# Altium PCB PG4D.PcbDoc (part 2 of 3)
Units mm, origin at the board's own origin, x right, y up, seen from the top; angles counter-clockwise.
Board outline 105.86 x 51.8 mm, 4 copper layers (Top Layer, L2 Flex GND, L3 Flex Signals, Bottom Layer), stack 0.361 mm thick; 218 components, 118 nets, 582 pads, 307 vias.
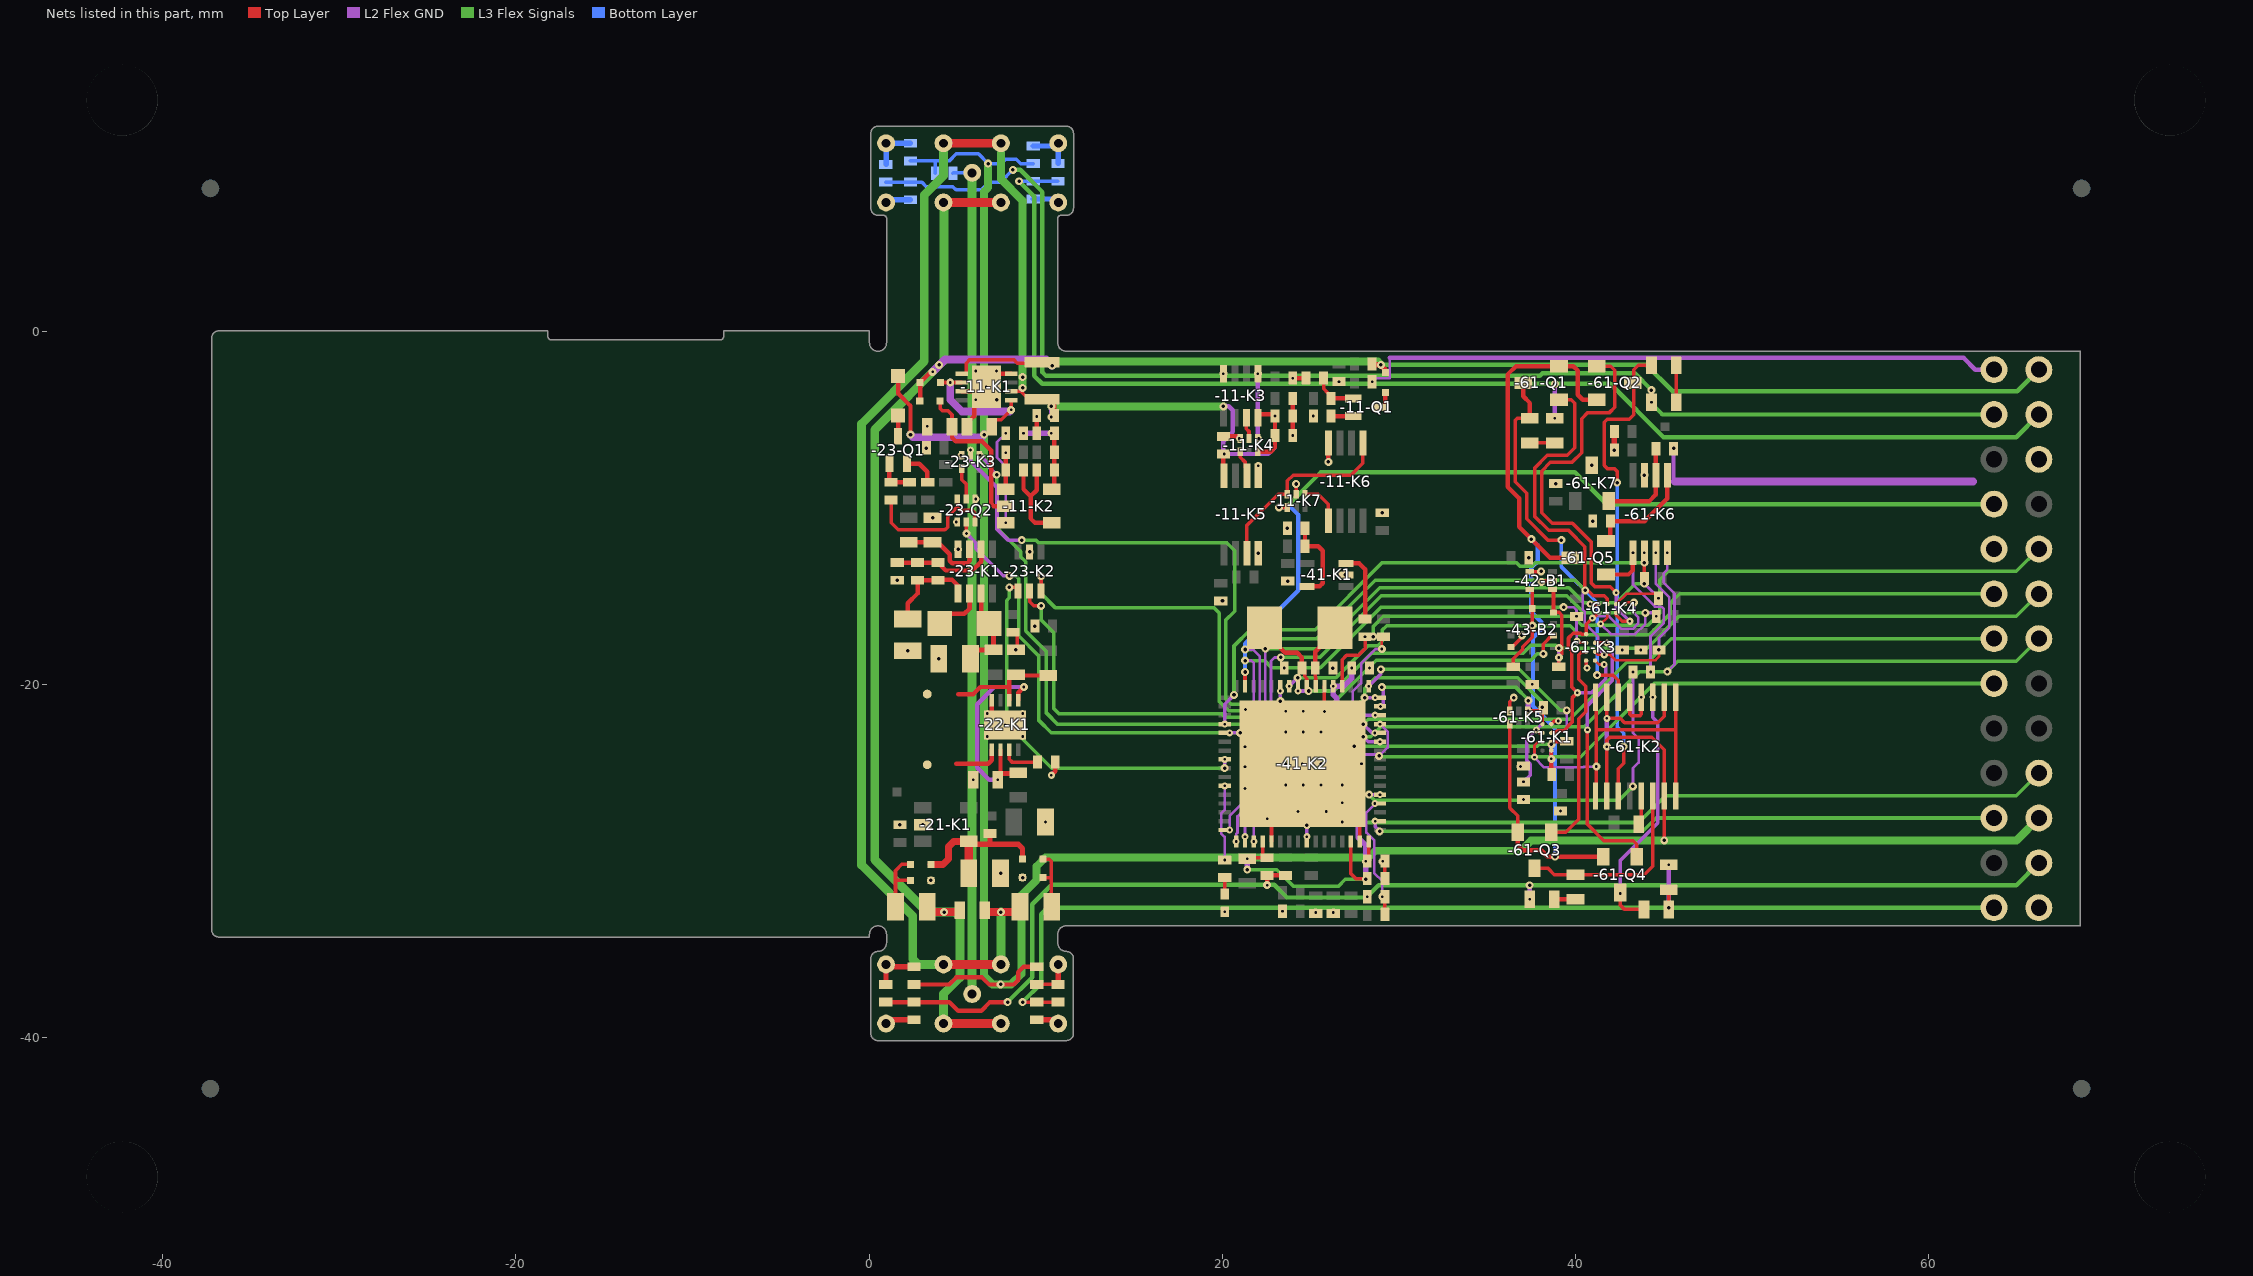
[diagram p4: the nets of this part, all layers, seen from the top]

## Via types
v1: diameter 0.45, hole 0.15, Top Layer to L2 Flex GND, tented both sides, 88 vias
v2: diameter 0.45, hole 0.2, Top Layer to Bottom Layer, tented both sides, 74 vias
v3: diameter 0.4, hole 0.15, Top Layer to L2 Flex GND, tented both sides, 61 vias
v4: diameter 0.45, hole 0.2, L2 Flex GND to L3 Flex Signals, 41 vias
v5: diameter 0.45, hole 0.2, L2 Flex GND to L3 Flex Signals, tented both sides, 23 vias
v6: diameter 0.4, hole 0.15, Top Layer to L2 Flex GND, tented top, 9 vias
v7: diameter 0.45, hole 0.15, Top Layer to L2 Flex GND, 8 vias
v8: diameter 0.45, hole 0.15, Top Layer to L2 Flex GND, tented top, 3 vias

## Nets (pads, with @x,y where several pads share a name; then routed paths per layer and width w, separated by ;. In a path a pad name is that pad's centre, name@x,y a point inside that pad or via, vN(x,y) a via of type N, cw(c..) or ccw(c..) an arc to the next point about the centre after c; other vN are vias at no path point) (continued)
3V3BUS: -11-C6.1 -11-C7.1 -11-C8.1 -11-C9.1 -11-K1.6 -11-K3.8 -11-K4.6 -11-K5.8 -11-R1.1 -11-R2.1 -11-R13.2 -11-R14.1 | length 27.9
  Top Layer w0.2: -11-K1.6@8.05,-3.4 8.6,-3.4 9.05,-3.85 -11-R13.2@9.75,-3.85
  Top Layer w0.25: -11-R13.2@9.8,-3.85 10.3,-3.85 10.5,-4.05 -11-C6.1@10.5,-4.775 ; -11-K5.8@20.075,-8.175 20.075,-7 v1(20.125,-6.95) ; -11-K3.8@22,-4.7 -11-C7.1@23.1,-4.7 ; -11-K4.6@22.025,-6.825 22.75,-6.825 23,-6.575 -11-C8.1@23,-5.9 v1(23,-4.8) ; v1(24,-2.65) -11-R2.1@24.75,-2.65
  L2 Flex GND w0.25: v1(10.325,-4.85) v5(10.325,-4.25) ; v5(20.075,-4.25) 20.375,-4.25 20.6,-4.475 20.6,-5.7 20.075,-6.225 20.075,-6.95 v1(20.125,-6.95) 22.625,-6.95 23,-6.575 v1(23,-4.8)
  L3 Flex Signals w0.45: v5(10.325,-4.25) v5(20.075,-4.25)
  other v1: 25.175,-4.8
ACCINT: -41-K2.27 -43-B2.7 | length 18
  Top Layer w0.2: v2(38.2,-18.275) 38.2,-17.719 38.694,-17.225 -43-B2.7@38.775,-17.225
  L2 Flex GND w0.2: v4(23.3,-20.95) v3(23.3,-20.375)
  L3 Flex Signals w0.2: v4(23.3,-20.95) 23.402,-21.052 26.298,-21.052 28.725,-18.625 37.5,-18.625 37.85,-18.275 v2(38.2,-18.275)
ANEN: -23-K3.4 -23-Q2.2 | length 1.8
  Top Layer w0.2: -23-K3.4@5.25,-7.775 5.25,-8.4 5.5,-8.65 -23-Q2.2@5.5,-9.5
ANFON: -23-Q2.5 -41-K2.37 | length 25.7
  Top Layer w0.2: -23-Q2.5@5.5,-10.8 5.5,-11.425 v1(5.525,-11.45)
  L2 Flex GND w0.2: v1(5.525,-11.45) 6.05,-11.975 6.05,-12.3 7.6,-13.85 v5(7.95,-13.85) v5@7.95,-13.875 ; v3(20.425,-22.75) v4(21.025,-22.75)
  L3 Flex Signals w0.2: v5(7.95,-13.85) 8.3,-13.85 8.475,-14.025 8.475,-17.25 9.625,-18.4 9.625,-22.05 10.325,-22.75 v4(21.025,-22.75)
ANODE: -1-R9.2 -1-R10.2 -1-R11.2 -1-R12.2 -1-R13.2 -2-X25.1 -23-R10.1 -61-K2.2 -61-K2.7 -61-K2.10 -61-K2.15 | length 156.6
  Top Layer w0.2: -61-K2.10@41.8,-26.325 v1(41.8,-23.525) 41.8,-23.175 41.975,-23 44.35,-23 45.05,-23.7 -61-K2.15@45.05,-26.325 v2(45.05,-28.841) ; v3@41.8,-22.05 v3(41.8,-21.925) ; -61-K2.7@41.8,-20.725 v3(41.8,-21.925) ; -61-K2.2@45.05,-20.725 45.05,-21.8 44.675,-22.175 42.8,-22.175 42.55,-21.925 v3(41.8,-21.925)
  Top Layer w0.25: -23-R10.1@1.65,-2.525 1.65,-3.525 2.35,-4.225 v2(2.35,-5.85) ; -1-R11.2@2.55,-37 4.55,-37 4.95,-36.6 6.4,-36.6 6.8,-37 v2(7.45,-37) 8.2,-37 8.45,-36.75 8.45,-36.3 8.75,-36 -1-R12.2@9.5,-36
  L2 Flex GND w0.25: v1(41.8,-23.525) 41.8,-23.1 v3(41.8,-21.925)
  L2 Flex GND w0.45: v2(2.35,-5.85) 2.5,-6 6.375,-6 v4(6.525,-5.85)
  L3 Flex Signals w0.45: v2(6.75,9.5) 6.75,8.15 6.525,7.925 v4(6.525,-5.85) 6.525,-36.525 7,-37 v2(7.45,-37) 8.05,-37 8.65,-36.4 8.65,-31.925 9.5,-31.075 9.5,-30.302 10.002,-29.8 28.301,-29.8 28.676,-29.425 36.925,-29.425 37.509,-28.841 v2(45.05,-28.841) 65,-28.841 -2-X25.1@66.27,-27.571
  Bottom Layer w0.2: -1-R10.2@2.35,9.65 3.75,9.65 ; -1-R13.2@3.75,8.95 3.75,9.65 ; -1-R9.2@9.3,9.5 8.6,9.5 8.35,9.75 7.75,9.75 7.5,9.5 v2(6.75,9.5) 6.2,10.05 4.95,10.05 4.55,9.65 3.75,9.65
BA_ISO: -21-C1.2 -21-R2.2 -21-R4.1 | length 3.9
  Top Layer w0.2: -21-C1.2@1.5,-32.6 1.5,-31.1 ; -21-R4.1@2.35,-31.1 1.5,-31.1 ; -21-R2.2@2.35,-30.2 1.85,-30.2 1.5,-30.55 1.5,-31.1
BB_ISO: -21-C2.2 -21-R3.2 -21-R5.1 | length 3.6
  Top Layer w0.2: -21-R5.1@9.825,-30.95 -21-R5.1@9.85,-30.95 10.325,-30.95 ; -21-R3.2@9.85,-29.9 10.2,-29.9 10.325,-30.025 10.325,-30.95 ; -21-C2.2@10.325,-32.6 10.325,-30.95
BUSA: -1-X21.1 -1-X31.1 -1-X61.1 -1-X71.1 -2-X1.1 -11-R4.1 -11-R5.2 -11-R6.1 -11-R7.1 -21-C1.1 -21-R1.1 | length 127.4
  Top Layer w0.25: 2.9,-3.75 -11-R5.2@2.9,-2.9 3.5,-2.3 v1(3.6,-2.3)
  Top Layer w0.3: -11-R7.1@28.5,-1.9 28.95,-1.9 29.25,-2.2 -11-R4.1@29.25,-2.325
  Top Layer w0.45: -21-C1.1@3.327,-32.9 v2(4.25,-32.9) 5.15,-32.9 -21-R1.1@5.15,-32.8
  Top Layer w0.5: -21-C1.1@3.3,-32.6 3.3,-32.873 -21-C1.1@3.327,-32.9 ; -1-X61.1@4.216,-39.215 -1-X71.1@7.468,-39.215 ; -1-X31.1@4.219,7.302 -1-X21.1@7.47,7.302
  L2 Flex GND w0.45: v1(3.6,-2.3) 4.3,-1.6 10.025,-1.6 v5(10.375,-1.95)
  L3 Flex Signals w0.25: v2@29.019,-1.894 44.019,-1.894 45.524,-3.4 65.041,-3.4 -2-X1.1@66.27,-2.171
  L3 Flex Signals w0.45: v5(10.375,-1.95) 10.627,-1.698 28.823,-1.698 v2@29.019,-1.894
  L3 Flex Signals w0.5: -1-X61.1@4.216,-39.215 4.216,-37.534 5.15,-36.6 5.15,-33.166 4.884,-32.9 v2(4.25,-32.9) 3.3,-32.9 0.325,-29.925 0.325,-5.575 4.25,-1.65 4.25,7.271 -1-X31.1@4.219,7.302
  other v2: 29,-1.9
  other v4: 3.975,-1.9
BUSB: -1-X22.1 -1-X32.1 -1-X62.1 -1-X72.1 -2-X2.1 -11-C1.2 -11-C2.2 -11-C3.2 -11-C4.2 -11-C6.2 -11-C7.2 -11-C8.2 -11-C9.2 -11-K1.3 -11-K1.8 -11-K1.9 -11-K2.1 -11-K3.4 -11-K4.3 -11-K5.5 -11-R8.2 -11-R9.1 -11-R11.1 -11-R15.2 -21-C2.1 -21-R1.2 | length 122.9
  Top Layer w0.25: v7(3.3,-5.375) -11-C2.2@3.3,-5.05 ; -11-K1.3@5.25,-3.4 -11-K1.9@5.9,-3.4 ; -11-C3.2@5.55,-5.4 5.55,-5.2 5.95,-4.8 -11-K1.9@5.95,-4.3 ; -11-K1.9@7.4,-2.4 -11-K1.8@8.05,-2.4 ; -11-K2.1@7.75,-8.95 -11-R9.1@7.75,-7.85 v7(7.75,-6.875) -11-R11.1@7.75,-6.85 ; -11-C4.2@9.5,-5.825 -11-C4.2@9.5,-5.775 v1(9.5,-4.825) ; -11-C9.2@20.075,-5.95 -11-K4.3@20.9,-5.95 ; v1(24,-5.9) -11-C7.2@24,-4.8 -11-R15.2@24,-3.8
  Top Layer w0.45: -21-R1.2@6.55,-32.8 6.65,-32.9 v2(7.468,-32.9) 8.25,-32.9 -21-C2.1@8.55,-32.6
  Top Layer w0.5: -1-X62.1@4.216,-35.862 -1-X72.1@7.468,-35.862 ; -1-X32.1@4.219,10.655 -1-X22.1@7.47,10.655
  L2 Flex GND w0.15: v1(28.5,-2.85) 28.683,-2.667 29.489,-2.667 29.489,-1.507
  L2 Flex GND w0.25: 29.489,-1.507 62.009,-1.507 62.674,-2.171 -2-X2.1@63.73,-2.171
  L3 Flex Signals w0.45: -1-X22.1@7.47,10.655 7.47,8.63 8.7,7.4 v4(8.7,-2.6) v4(8.7,-3.2)
  L3 Flex Signals w0.5: -1-X62.1@4.216,-35.862 2.762,-35.862 2.475,-35.575 2.475,-33.125 -0.425,-30.225 -0.425,-5.25 3.125,-1.7 3.125,7.725 4.219,8.819 -1-X32.1@4.219,10.655 ; -1-X72.1@7.468,-35.862 v2(7.468,-32.9)
  other v1: 22.05,-7.625 6.05,-3.875 6.65,-3.15 26.625,-2.85 20.075,-2.4 6.05,-2.25 7.225,-2.25
  other v2: 7.225,-3.875
  other v3: 20.975,-6.075
CH1: -1-R1.2 -1-R5.2 -2-X21.1 -61-C11.1 | length 74.4
  L2 Flex GND w0.25: v1(38.85,-4.925) v4(38.85,-2.975)
  L3 Flex Signals w0.25: v2(8.5,8.5) 9.35,7.65 9.35,-2.517 9.808,-2.975 v4(38.85,-2.975) 41.989,-2.975 45.009,-5.994 64.986,-5.994 -2-X21.1@66.27,-4.711
  Bottom Layer w0.2: v2(8.5,8.5) -1-R1.2@9.3,8.5 -1-R5.2@10.7,8.5
CH2: -1-R2.2 -1-R6.2 -2-X22.1 -61-C12.1 | length 76.4
  L2 Flex GND w0.25: v1(44.325,-4.025) v5(44.325,-3.327)
  L3 Flex Signals w0.25: v2(8.15,9.15) 8.56,9.15 9.823,7.887 9.823,-2.323 10.025,-2.525 38,-2.525 38.15,-2.375 43.373,-2.375 v5(44.325,-3.327) 44.325,-4.091 44.945,-4.711 -2-X22.1@63.73,-4.711
  Bottom Layer w0.2: -1-R6.2@0.95,8.45 -1-R2.2@2.35,8.45 3,8.45 3.25,8.2 4.75,8.2 4.93,8.02 6.37,8.02 6.8,8.45 7.45,8.45 v2(8.15,9.15)
CH3: -1-R3.2 -1-R7.2 -2-X23.1 -61-C13.1 | length 72.8
  Top Layer w0.25: -1-R7.2@0.95,-38 -1-R3.2@2.55,-38 4.55,-38 5.05,-38.5 6.35,-38.5 6.85,-38 v2(7.85,-38)
  L2 Flex GND w0.25: v1(37.425,-32.175) v5(37.425,-31.381)
  L3 Flex Signals w0.25: v2(7.85,-38) 9.25,-36.6 9.25,-32.45 10.35,-31.35 22.95,-31.35 23.675,-32.075 28.174,-32.075 28.868,-31.381 v5(37.425,-31.381) 65,-31.381 -2-X23.1@66.27,-30.111
CH4: -1-R4.2 -1-R8.2 -2-X24.1 -61-C14.1 | length 64
  Top Layer w0.2: v2(8.7,-38) -1-R4.2@9.5,-38 -1-R8.2@10.7,-38
  L2 Flex GND w0.25: v5(45.3,-32.65) v1(45.3,-30.225)
  L3 Flex Signals w0.25: v2(8.7,-38) 9.75,-36.95 9.75,-33.025 10.124,-32.651 -2-X24.1@63.73,-32.651
CMPX: -11-K5.3 -11-K6.1 -11-K7.3 | length 11.2
  Top Layer w0.2: -11-K5.3@21.4,-12.575 21.4,-11 23.175,-9.225 -11-K7.3@23.7,-9.225 23.7,-8.475 24.025,-8.15 27.3,-8.15 27.975,-7.475 -11-K6.1@27.975,-6.325
CMPXBUS: -11-K4.4 -11-K5.6 | length 1.5
  Top Layer w0.15: -11-K5.6@21.3,-7.7 21.4,-7.8 -11-K5.6@21.4,-8.175
  Top Layer w0.2: -11-K4.4@21.025,-6.825 21.025,-7.125 21.3,-7.4 -11-K5.6@21.3,-7.7
DISCHARGE: -41-K2.17 -61-K1.2 -61-R2.2 | length 15.2
  Top Layer w0.2: -61-K1.2@38.65,-23.25 -61-R2.2@39.35,-23.25
  L2 Flex GND w0.15: v3(39.525,-23.225) v5(39.525,-21.475)
  L2 Flex GND w0.2: v3(28.3,-20.1) 29,-19.4 v4(29,-19.15)
  L3 Flex Signals w0.2: v4(29,-19.15) 36.825,-19.15 39.15,-21.475 v5(39.525,-21.475)
DISCHARGE1: -61-C21.2 -61-K2.6 -61-Q1.3 | length 22.5
  Top Layer w0.2: -61-C21.2@37.425,-4.925 36.725,-4.925 36.6,-5.05 36.6,-8.525 37.25,-9.175 37.25,-10.625 38.45,-11.825 v2(39.225,-11.825) ; v2(41.25,-19.475) 42.15,-19.475 42.45,-19.775 -61-K2.6@42.45,-20.725
  Top Layer w0.25: -61-C21.2@37.06,-4.91 37.44,-4.91 37.44,-4.064 37.06,-3.684 -61-Q1.3@37.06,-2.925
  Bottom Layer w0.2: v2(39.225,-11.825) 39.225,-13.35 41.25,-15.375 v2(41.25,-19.475)
DISCHARGE2: -61-C22.2 -61-K2.11 -61-Q2.3 | length 27.5
  Top Layer w0.2: v2(42.375,-8.575) 42.375,-7.925 42.225,-7.775 41.825,-7.775 41.65,-7.6 41.65,-5.15 41.825,-4.975 43.075,-4.975 43.315,-4.735 43.315,-2.185 43.575,-1.925 -61-C22.2@44.325,-1.925 ; -61-K2.11@42.45,-26.325 42.45,-24.775 42.75,-24.475 v2(42.75,-23.525)
  Bottom Layer w0.2: v2(42.375,-8.575) 42.375,-22.4 42.75,-22.775 v2(42.75,-23.525)
DISCHARGE3: -61-C23.2 -61-K2.14 -61-Q3.3 | length 11
  Top Layer w0.2: -61-Q3.3@37.7,-30.415 38.465,-30.415 38.825,-30.775 -61-C23.2@40.025,-30.775 43.925,-30.775 44.4,-30.3 -61-K2.14@44.4,-26.325
DISCHARGE4: -61-C24.2 -61-K2.3 -61-Q4.3 | length 14.3
  Top Layer w0.2: -61-Q4.3@42.55,-31.79 v1(42.55,-31.85) 42.55,-32.5 42.8,-32.75 -61-C24.2@43.9,-32.75
  L2 Flex GND w0.2: v1(42.55,-31.85) 42.55,-29.975 44.675,-27.85 44.675,-22.15 44.4,-21.875 v3(44.4,-20.725)
GND: -2-X5.1 -2-X9.1 -11-C10.2 -11-C11.2 -11-K5.4 -11-K6.4 -11-K7.2 -21-C3.2 -21-C4.2 -21-K1.2 -21-R4.2 -21-R5.2 -21-R7.2 -22-C1.2 -22-C2.2 -22-K1.8 -22-K1.9 -22-R4.2 -23-C1.2 -23-C2.2 -23-C3.2 -23-C5.2 -23-K1.4 -23-K2.5 -23-K3.3 -23-Q2.1 -23-Q2.4 -23-R4.2 -23-R9.2 -23-R12.2 -41-C1.2 -41-C2.2 -41-C3.2 -41-C4.2 -41-C5.2 -41-C6.2 -41-C7.2 -41-K1.2 -41-K2.22 -41-K2.53 -41-K2.63 -41-K2.65 -41-R10.1 -41-R13.2 -41-R15.2 -41-R17.2 -42-B1.2 -42-B1.4 -42-C1.2 -42-C2.2 -43-B2.4 -43-C1.2 -43-C2.2 -43-R3.2 -61-C1.2 -61-C2.2 -61-C3.2 -61-C4.2 -61-C5.2 -61-C6.2 -61-C8.2 -61-C9.2 -61-K1.4 -61-K2.4 -61-K2.5 -61-K3.4 -61-K4.4 -61-K5.3 -61-K6.7 -61-K7.3 -61-R4.2 -61-R10.2 pad.36mils | length 37.3
  Top Layer w0.15: -23-R4.2@8.15,-17.05 8.3,-17.05 -23-R4.2@8.4,-17.15
  Top Layer w0.2: -22-C2.2@8.4,-18 -23-R4.2@8.4,-17.15 ; -41-K2.53@22.8,-28.9 -41-K2.65@22.8,-27.925 ; -11-K7.2@24.2,-9.225 v2(24.2,-8.65) ; -41-K2.22@25.8,-20.1 25.8,-21.533 v1(25.806,-21.539) ; -41-K2.63@27.8,-28.9 -41-K2.65@27.8,-27.975 ; v1(29.1,-30.025) 29.225,-30.15 -41-C7.2@29.225,-31 ; -61-K5.3@36.3,-21.5 36.3,-20.975 v2(36.525,-20.75) ; -43-B2.4@36.375,-17.875 36.456,-17.875 36.982,-17.349 v2(36.982,-17.221) ; -42-B1.4@37.425,-13.625 38.05,-13.625 v2(38.075,-13.6) ; v1(38.1,-14.2) 38.175,-14.125 -42-B1.2@38.725,-14.125 ; -61-K1.4@38.65,-22.25 38.825,-22.075 v6(39.05,-22.075) ; -61-K3.4@40.625,-18.65 40.625,-19.025 v6(40.675,-19.075) ; v6(40.85,-15.45) -61-K4.4@41.325,-15.45 ; -61-K2.5@43.1,-20.725 43.1,-21.7 43.175,-21.775 43.675,-21.775 43.75,-21.7 v3(43.75,-20.725)
  Top Layer w0.25: -22-K1.9@6.95,-21.55 -22-K1.8@6.95,-20.9 ; v3(10.325,-25.15) 10.55,-24.925 -22-R4.2@10.55,-24.4 ; v8(22.55,-31.375) -41-C6.2@22.55,-30.825 -41-R17.2@23.6,-30.825 ; v2(26.025,-7.4) -11-K6.4@26.025,-6.325
  Top Layer w0.3: v2(42.225,-6.725) -61-C5.2@42.225,-5.675
  L2 Flex GND w0.25: v2(45.575,-6.625) 45.575,-8.441 45.643,-8.509
  L2 Flex GND w0.45: 45.643,-8.509 62.535,-8.509
  other v1: 25.3,-32.925 26.3,-32.925 20.15,-32.875 23.425,-32.85 28.225,-32.025 10,-27.8 26.8,-27.8 22.555,-27.61 24.3,-27.2 25.9,-27.2 39.175,-27.175 26.8,-26.7 37.075,-26.525 21.3,-25.9 23.6,-25.7 24.6,-25.7 25.6,-25.7 26.8,-25.7 5.9,-25.4 21.3,-24.675 36.902,-24.651 23.6,-24.5 24.55,-24.5 25.6,-24.5 27.9,-24.5 21.3,-23.525 23.6,-22.7 24.6,-22.7 25.6,-22.7 23.6,-21.525 24.6,-21.525 21.325,-21.425 37.575,-20 23.525,-19.075 28.35,-19.075 42.675,-18.05 43.725,-18.05
  other v2: 3.5,-31.1 8.7,-30.95 7.45,-30.7 1.75,-27.95 3.05,-27.95 26.275,-19.075 3.95,-18.55 2.2,-18.1 8.325,-18.05 9.4,-16.7 20.025,-15.275 23.725,-14.15 1.6,-14.1 26.975,-13.8 37.375,-12.825 22.05,-12.575 9.1,-12.5 5.05,-12.35 23.7,-11.15 41,-10.75 3.6,-10.55 29.075,-10.275 38.9,-8.625 43.925,-8.15 40.95,-7.585 3.25,-6.629
  other v3: 6.7,-22.95 8.7,-22.95 7.7,-22.3 6.7,-21.65 8.7,-21.65 4.95,-10.8 6.05,-9.5 5.2,-7.025
HEARTBEAT: -41-K2.43 -41-R9.1 | length 4.4
  L2 Flex GND w0.15: v1(20.15,-29.95) 20.15,-28.65 19.95,-28.45 19.95,-27.325 20.15,-27.125 v3(20.15,-25.75)
HIZVT: -41-K2.4 -41-R12.2 -41-R13.1 | length 6.9
  Top Layer w0.2: v1(29.075,-32.025) 29.125,-32.025 29.225,-32.125 -41-R12.2@29.225,-33.025
  L2 Flex GND w0.15: v3(28.651,-26.751) 28.651,-26.774 28.175,-27.25 28.175,-28.4 28.626,-28.851 28.626,-30.701 29.075,-31.15 v1(29.075,-32.025)
MISO: -2-X20.1 -41-K2.13 -41-R18.2 | length 48.2
  Top Layer w0.15: v1(29.05,-18) -41-R18.2@29.05,-17.3
  L2 Flex GND w0.15: v3(28.95,-22.25) 29.377,-22.677 29.377,-23.576 v4(28.901,-24.051) 28.825,-23.975 27.275,-23.975 27.023,-23.723 27.023,-21.577 27.4,-21.2 27.4,-20.396 27.875,-19.921 27.875,-18.825 28.7,-18 v1(29.05,-18)
  L3 Flex Signals w0.2: v4(28.901,-24.051) 28.954,-24.104 40.321,-24.104 44.474,-19.951 -2-X20.1@63.73,-19.951
MOSI: -2-X19.1 -23-K2.3 -41-K2.12 -61-K6.3 | length 70.7
  Top Layer w0.2: -23-K2.3@9.75,-14.7 v2(9.75,-13.875)
  L2 Flex GND w0.15: v3(44.575,-12.55) 44.575,-14.302 45.329,-15.056 45.329,-16.796 44.75,-17.375 v5(44.75,-18.05)
  L2 Flex GND w0.2: v4(28,-22.25) 28.501,-22.751 v3(28.651,-22.751)
  L3 Flex Signals w0.2: v2(9.75,-13.875) 9.75,-14.855 10.566,-15.672 19.558,-15.672 19.846,-15.96 19.846,-20.971 20.375,-21.5 22.375,-21.5 23.125,-22.25 v4(28,-22.25) 28.275,-21.975 39.703,-21.975 42.928,-18.75 44.1,-18.75 45.439,-17.411 -2-X19.1@63.73,-17.411
N3V3BUS: -11-C4.1 -11-C12.2 -11-K2.5 -11-R10.2 -11-R12.2 | length 4.9
  Top Layer w0.25: v7(10.325,-5.775) -11-C4.1@10.5,-5.775 ; -11-K2.5@10.5,-8.95 -11-R10.2@10.5,-7.85 -11-R12.2@10.5,-6.85 -11-C4.1@10.5,-5.85
  L2 Flex GND w0.3: v7(8.75,-5.775) v7(10.325,-5.775)
NDA2CS: -23-K2.1 -41-K2.40 | length 22.4
  Top Layer w0.2: v2(7.95,-14.5) -23-K2.1@8.45,-14.5
  Top Layer w0.25: -23-K2.1@8.45,-14.7 -23-K2.1@8.45,-14.5
  L2 Flex GND w0.2: v4(20.15,-24.75) v3(20.15,-24.25)
  L3 Flex Signals w0.2: v2(7.95,-14.5) 7.95,-15.1 7.8,-15.25 7.8,-22.2 10.35,-24.75 v4(20.15,-24.75)
NDACS: -41-K2.36 -61-K6.2 -61-R9.2 | length 32.1
  Top Layer w0.2: -61-R9.2@43.925,-14.1 -61-R9.2@43.925,-14 v3(43.925,-12.55)
  L2 Flex GND w0.2: v3(20.15,-22.25) 20.15,-21.125 v4(20.675,-20.6) ; v5(43.925,-13.1) v3(43.925,-12.55)
  L3 Flex Signals w0.2: v4(20.675,-20.6) 20.675,-17.825 21.6,-16.9 25.275,-16.9 29.075,-13.1 36.675,-13.1 36.877,-13.302 37.573,-13.302 37.775,-13.1 v5(43.925,-13.1)
Net-1-R1_1: -1-R1.1 -1-X11.1 | length 1.1
  Bottom Layer w0.3: -1-R1.1@9.3,7.5 -1-X11.1@10.35,7.5
Net-1-R2_1: -1-R2.1 -1-X41.1 | length 1.1
  Bottom Layer w0.3: -1-X41.1@1.3,7.45 -1-R2.1@2.35,7.45
Net-1-R3_1: -1-R3.1 -1-X51.1 | length 1.3
  Top Layer w0.3: -1-X51.1@1.3,-39 -1-R3.1@2.55,-39
Net-1-R4_1: -1-R4.1 -1-X81.1 | length 0.9
  Top Layer w0.3: -1-R4.1@9.5,-39 -1-X81.1@10.4,-39
Net-1-R5_1: -1-R5.1 -1-R9.1 -1-X12.1 | length 2.2
  Bottom Layer w0.2: -1-R5.1@10.7,9.5 -1-R5.1@10.721,9.521
  Bottom Layer w0.3: -1-R9.1@9.3,10.5 -1-X12.1@10.35,10.5 ; -1-R5.1@10.721,9.521 -1-X12.1@10.721,10.655
Net-1-R6_1: -1-R6.1 -1-R10.1 -1-X42.1 | length 2.6
  Bottom Layer w0.2: -1-R6.1@0.95,9.45 -1-R6.1@0.967,9.467 ; -1-R10.1@2.345,10.655 -1-R10.1@2.35,10.65
  Bottom Layer w0.3: -1-R6.1@0.967,9.467 -1-X42.1@0.967,10.655 -1-R10.1@2.345,10.655
Net-1-R7_1: -1-R7.1 -1-R11.1 -1-X52.1 | length 2.4
  Top Layer w0.2: -1-R7.1@0.95,-37 -1-R7.1@0.965,-36.985
  Top Layer w0.3: -1-R7.1@0.965,-36.985 -1-X52.1@0.965,-35.862 ; -1-X52.1@1.3,-36 -1-R11.1@2.55,-36
Net-1-R8_1: -1-R8.1 -1-R12.1 -1-X82.1 | length 2.3
  Top Layer w0.2: -1-R12.1@9.5,-37 -1-R8.1@10.7,-37 -1-R8.1@10.719,-36.981
  Top Layer w0.3: -1-R8.1@10.719,-36.981 -1-X82.1@10.719,-35.862
Net-1-R13_1: -1-R13.1 -1-X1.1 -1-X2.1 | length 47.6
  L3 Flex Signals w0.5: -1-X2.1@5.842,-37.539 5.842,8.977 -1-X1.1@5.844,8.979
  Bottom Layer w0.2: -1-R13.1@4.75,8.95 4.779,8.979 -1-X1.1@5.844,8.979
Net-11-C2_1: -11-C2.1 -11-K2.2 -11-R6.2 | length 9
  Top Layer w0.2: -11-R6.2@4.025,-3.95 4.025,-4.375 4.15,-4.5 4.475,-4.5 4.7,-4.725 -11-C2.1@4.7,-5.2
  Top Layer w0.25: -11-C2.1@4.7,-5.2 4.7,-6.021 4.904,-6.225 6.4,-6.225 6.925,-6.75 6.925,-9.775 7.05,-9.9 -11-K2.2@7.75,-9.9
Net-11-C3_1: -11-C3.1 -11-K1.2 -11-K1.5 -11-R5.1 | length 8.2
  Top Layer w0.2: -11-R5.1@4.05,-2.9 v1(4.6,-2.9) -11-K1.2@5.25,-2.9 ; -11-C3.1@6.95,-5.4 6.95,-5 7.5,-5 v1(8.05,-4.45) ; v1@8.05,-4.4 -11-K1.5@8.05,-3.9
  Top Layer w0.25: v1(8.05,-4.45) v1@8.05,-4.4
  L2 Flex GND w0.45: v1(4.6,-2.9) 4.6,-3.875 5.275,-4.55 7.95,-4.55 v1(8.05,-4.45)
Net-11-C12_1: -11-C12.1 -11-K2.3 | length 5.5
  L2 Flex GND w0.15: v7(7.75,-10.85) 7.75,-7.65 7.25,-7.15 7.25,-6.275 v7(7.75,-5.775)
Net-11-K1_1: -11-K1.1 -11-R13.1 | length 5.1
  Top Layer w0.2: -11-K1.1@5.5,-2.425 5.5,-1.8 5.7,-1.6 8.204,-1.6 8.404,-1.8 -11-R13.1@9.8,-1.8
Net-11-K2_4: -11-K2.4 -11-R9.2 -11-R10.1 | length 5.9
  Top Layer w0.25: -11-R9.2@8.75,-7.85 8.75,-8.95 9.15,-9.35 ; -11-R10.1@9.5,-7.85 9.5,-9 9.15,-9.35 ; -11-K2.4@10.35,-10.85 9.4,-10.85 9.15,-10.6 9.15,-9.35
Net-11-K3_1: -11-K3.1 -11-K4.1 | length 3.7
  L2 Flex GND w0.25: v1(22.025,-2.4) 22.025,-6.025 v3(22.075,-6.075)
Net-11-K3_7: -11-K3.7 -11-K4.2 | length 1.2
  Top Layer w0.2: -11-K3.7@21.375,-4.9 21.375,-5.525 21.525,-5.675 -11-K4.2@21.525,-6.075
Net-11-K6_5: -11-K6.5 -11-K7.1 | length 2.5
  Top Layer w0.2: -11-K7.1@24.7,-9.225 25.45,-9.225 26.025,-9.8 -11-K6.5@26.025,-10.725
Net-11-Q1_1: -11-Q1.1 -11-R2.2 -11-R3.1 | length 2.6
  Top Layer w0.15: -11-R3.1@26,-3.5 26.175,-3.675 -11-R3.1@26.175,-3.8
  Top Layer w0.2: -11-R2.2@25.75,-2.65 25.75,-3.25 -11-R3.1@26,-3.5
  Top Layer w0.25: -11-R3.1@26.175,-3.8 -11-Q1.1@27.425,-3.8
Net-11-Q1_2: -11-Q1.2 -11-R1.2 | length 1.3
  Top Layer w0.25: -11-R1.2@26.175,-4.8 -11-Q1.2@27.425,-4.8
Net-11-Q1_3: -11-Q1.3 -11-R4.2 | length 1.1
  Top Layer w0.25: -11-Q1.3@28.975,-4.3 29.25,-4.3 -11-R4.2@29.25,-3.475
Net-21-C3_1: -21-C3.1 -21-K1.4 -21-R2.1 -21-R3.1 -21-R6.1 | length 9
  Top Layer w0.3: -21-K1.4@5.95,-29.05 6.85,-29.05 ; -21-R6.1@6.85,-28.45 6.85,-29.05 ; -21-R3.1@8.7,-29.9 8.7,-29.3 8.45,-29.05 6.85,-29.05
  Top Layer w0.4: -21-R2.1@3.5,-30.2 4.2,-30.2 4.5,-29.9 4.5,-29.2 4.8,-28.9 -21-K1.4@5.65,-28.9
  Top Layer w0.5: -21-C3.1@5.65,-30.7 -21-K1.4@5.65,-28.9
Net-22-C1_1: -22-C1.1 -22-K1.2 -22-K1.5 -22-R1.2 | length 11.5
  Top Layer w0.25: -22-C1.1@7.45,-25.2 7.45,-25.05 -22-K1.2@7.45,-23.7 ; -22-K1.5@8.45,-20.9 8.45,-20.475 v8(8.775,-20.15)
  Top Layer w0.3: -22-C1.1@7.45,-25.05 8.4,-25.05 -22-R1.2@8.45,-25
  L2 Flex GND w0.25: v1(7.3,-25.4) 6.8,-25.4 6.125,-24.725 6.125,-21.125 7.1,-20.15 v8(8.775,-20.15)
Net-22-C2_1: -22-C2.1 -22-K1.6 -22-R2.1 -22-R3.2 | length 6.6
  Top Layer w0.25: 5.05,-20.55 5.9,-20.55 6.3,-20.15 7.95,-20.15 ; -22-K1.6@7.95,-20.9 7.95,-20.15 ; -22-R2.1@10.15,-19.5 8.1,-19.5 7.95,-19.65 7.95,-20.15
Net-22-K1_1: -22-K1.1 -22-R3.1 | length 2.7
  Top Layer w0.25: 4.95,-24.5 6.75,-24.5 6.95,-24.3 -22-K1.1@6.95,-23.7
Net-22-K1_3: -22-K1.3 -22-R4.1 | length 2.2
  Top Layer w0.2: -22-K1.3@7.95,-23.7 7.95,-24.25 8.1,-24.4 -22-R4.1@9.55,-24.4
Net-23-C1_1: -23-C1.1 -23-K1.7 -23-R1.2 -23-R3.1 | length 5.1
  Top Layer w0.25: -23-C1.1@5.75,-18.55 5.75,-18.4 -23-C1.1@6.1,-18.05 ; -23-K1.7@6.35,-14.85 6.35,-16.15 6.75,-16.55 -23-R3.1@6.8,-16.55
  Top Layer w0.3: -23-C1.1@6.1,-18.05 -23-R1.2@7.05,-18.05 7.05,-16.8 -23-R3.1@6.8,-16.55
Net-23-C3_1: -23-C3.1 -23-K1.3 -23-R2.1 | length 4.9
  Top Layer w0.25: -23-R2.1@2.25,-11.95 -23-C3.1@3.6,-11.95 3.9,-11.95 4.573,-12.623 4.573,-13.004 4.717,-13.148 5.552,-13.148 5.7,-13 -23-K1.3@5.7,-12.35
Net-23-C4_1: -23-C4.1 -23-C5.1 -23-K1.5 -23-R8.1 | length 5.1
  Top Layer w0.25: -23-C5.1@2.2,-16.3 2.2,-15.4 2.75,-14.85 -23-R8.1@2.75,-14.1 -23-C4.1@3.9,-14.1 ; -23-C4.1@4.125,-14.075 4.7,-14.075 5.05,-14.425 -23-K1.5@5.05,-14.85
Net-23-C4_2: -23-C4.2 -23-K1.2 -23-R8.2 -23-R9.1 | length 5.8
  Top Layer w0.25: -23-R9.1@1.6,-13.1 -23-R8.2@2.75,-13.1 -23-C4.2@3.9,-13.1 4.35,-13.55 5.85,-13.55 6.35,-13.05 -23-K1.2@6.35,-12.35
Net-23-K1_6: -23-K1.6 -23-R3.2 | length 2.9
  Top Layer w0.25: -23-R3.2@4,-16.45 4.45,-16 5.4,-16 5.7,-15.7 -23-K1.6@5.7,-14.85
Net-23-Q1_1: -23-Q1.1 -23-R6.2 -23-R7.1 | length 2.3
  Top Layer w0.25: -23-R7.1@1.15,-8.55 -23-Q1.1@1.15,-7.5 -23-Q1.1@1.15,-7.325 ; -23-R7.1@1.25,-8.55 -23-R6.2@2.3,-8.55
Net-23-Q1_2: -23-Q1.2 -23-R5.2 | length 1.9
  Top Layer w0.25: -23-Q1.2@2.15,-7.5 2.85,-7.5 3.3,-7.95 -23-R5.2@3.3,-8.55
Net-23-Q1_3: -23-Q1.3 -23-R10.2 | length 1.1
  Top Layer w0.25: -23-Q1.3@1.65,-5.775 -23-R10.2@1.65,-4.775 -23-R10.2@1.65,-4.7
Net-23-Q2_3: -23-Q2.3 -23-Q2.6 -23-R7.2 | length 8.2
  Top Layer w0.2: -23-R7.2@1.25,-9.55 1.25,-10.85 1.65,-11.25 4.3,-11.25 4.45,-11.1 4.45,-10.5 5,-9.95 ; -23-Q2.3@5,-9.5 5,-9.95 ; -23-Q2.6@6,-10.8 6,-10.3 5.85,-10.15 5.2,-10.15 5,-9.95
Net-41-C2_1: -41-C2.1 -41-K2.23 -41-T1.2 | length 3.8
  Top Layer w0.2: -41-C2.1@25.275,-19.075 25.275,-19.56 25.3,-19.585 -41-K2.23@25.3,-20.1
  Top Layer w0.25: -41-C2.1@25.275,-19.075 25.275,-18.159 26.4,-17.034 -41-T1.2@26.4,-16.8
Net-41-C3_1: -41-C3.1 -41-K2.24 -41-T1.1 | length 4.7
  Top Layer w0.2: -41-C3.1@24.525,-19.075 24.675,-19.225 24.675,-19.55 24.8,-19.675 -41-K2.24@24.8,-20.1
  Top Layer w0.25: -41-T1.1@22.4,-16.8 22.4,-17.041 23.571,-18.212 24.257,-18.212 24.525,-18.48 -41-C3.1@24.525,-19.075
Net-41-C4_1: -41-C4.1 -41-C5.1 -41-C6.1 -41-K2.21 -41-K2.52 -41-K2.64 -41-R11.2 | length 24.3
  Top Layer w0.2: -41-R11.2@21.675,-29.825 -41-C6.1@22.3,-29.825 ; -41-K2.52@22.3,-28.9 -41-C6.1@22.3,-29.825 ; -41-C6.1@22.55,-29.825 -41-C6.1@22.3,-29.825 ; -41-C4.1@28.3,-30.025 -41-K2.64@28.3,-28.9
  L2 Flex GND w0.3: v4(21.425,-30.5) v1(21.425,-29.875) ; v1(27.35,-19.075) 27.35,-19.65 26.9,-20.1 v3(26.3,-20.1) 26.302,-20.102 26.302,-20.602 26.5,-20.8 26.5,-23.95 27.7,-25.15 27.7,-28.675 28.143,-29.118 v1(28.143,-30.023) v4(28.143,-31.039)
  L3 Flex Signals w0.2: v4(21.425,-30.5) 23.1,-30.5 24.025,-31.425 26.6,-31.425 26.986,-31.039 v4(28.143,-31.039)
Net-41-C7_1: -41-C7.1 -41-K2.62 | length 2.8
  Top Layer w0.2: -41-K2.62@27.3,-28.9 27.3,-30.725 27.575,-31 -41-C7.1@28.175,-31
Net-41-K1_3: -41-K1.3 -41-R1.1 | length 4
  Top Layer w0.25: -41-K1.3@27.025,-13.15 27.775,-13.15 28.1,-13.475 -41-R1.1@28.1,-16.3
Net-41-K1_5: -41-K1.5 -41-R14.2 -41-R15.1 | length 4.9
  Top Layer w0.25: -41-R15.1@24.7,-11.15 -41-R14.2@24.7,-12.175 25.45,-12.175 25.7,-12.425 25.7,-14.275 25.525,-14.45 -41-K1.5@24.825,-14.45
Net-41-K2_5: -41-K2.5 -41-R2.2 | length 22.8
  L2 Flex GND w0.15: v5(43.275,-25.775) 43.275,-24.75 43.6,-24.425 43.6,-23.075 43.275,-22.75 v7(43.275,-19.3)
  L2 Flex GND w0.2: v4(28.325,-26.25) v3(28.95,-26.25)
  L3 Flex Signals w0.2: v4(28.325,-26.25) 28.627,-26.552 42.498,-26.552 v5(43.275,-25.775)
Net-41-R9_2: -41-R9.2 -41-R10.2 | length 0.9
  Top Layer w0.2: -41-R10.2@20.15,-31.875 -41-R9.2@20.15,-30.95
Net-61-C9_1: -61-C9.1 -61-K6.6 -61-K7.2 | length 5.4
  Top Layer w0.25: -61-K7.2@41.9,-9.615 44.21,-9.615 44.575,-9.25 -61-K6.6@44.575,-8.15 -61-C9.1@44.575,-6.65
Net-61-C11_2: -61-C11.2 -61-C21.1 | length 1.4
  Top Layer w0.2: -61-C21.1@37.425,-6.325 -61-C11.2@38.85,-6.325
Net-61-C12_2: -61-C12.2 -61-C22.1 | length 2.2
  Top Layer w0.2: -61-C12.2@45.725,-4.025 -61-C22.1@45.725,-1.925 -61-C22.1@45.725,-1.85
Net-61-C13_2: -61-C13.2 -61-C23.1 | length 1.2
  Top Layer w0.25: -61-C13.2@38.825,-32.175 -61-C23.1@40.025,-32.175
Net-61-C14_2: -61-C14.2 -61-C24.1 | length 1.1
  Top Layer w0.2: -61-C24.1@45.3,-32.75 -61-C14.2@45.3,-31.625
Net-61-K1_7: -61-K1.7 -61-K2.1 -61-K2.8 -61-K2.9 -61-K2.16 | length 20.7
  Top Layer w0.15: v6(37.702,-24.126) 37.702,-23.473 37.925,-23.25 -61-K1.7@38.15,-23.25
  Top Layer w0.2: -61-K2.9@41.2,-26.325 v1(41.2,-24.65) 41.2,-22.575 ; -61-K2.8@41.2,-20.725 41.2,-22.575 ; -61-K2.16@45.7,-26.325 45.7,-22.575 ; -61-K2.1@45.7,-20.725 45.7,-22.575 ; 41.2,-22.575 45.7,-22.575
  L2 Flex GND w0.15: v6(37.702,-24.126) 37.702,-24.152 38.25,-24.7 40.475,-24.7 40.5,-24.675 41.175,-24.675 v1(41.2,-24.65)
Net-61-K2_13: -61-K2.13 -61-R11.2 | length 1.6
  Top Layer w0.2: -61-R11.2@43.75,-27.925 -61-K2.13@43.75,-26.325
Net-61-K6_5: -61-K6.5 -61-Q5.2 -61-R10.1 | length 6.2
  Top Layer w0.25: -61-Q5.2@42,-11.875 -61-R10.1@42,-10.75 43.95,-10.75 45.225,-9.475 -61-K6.5@45.225,-8.15
NOUTEN1: -41-K2.51 -61-K4.6 -61-R8.2 | length 38.7
  Top Layer w0.15: v6(41.45,-16.575) 41.825,-16.2 -61-K4.6@41.825,-15.95
  L2 Flex GND w0.15: 21.8,-28.7 21.8,-27.5 22.775,-26.525 22.775,-18.675 22.975,-18.475 v4(23.325,-18.475) ; v6(41.45,-16.575) 42.029,-17.154 43.402,-17.154 43.975,-16.581 v4(43.975,-15.95)
  L2 Flex GND w0.2: v4(43.975,-15.95) 44.4,-15.95 v3(44.6,-16.15)
  L3 Flex Signals w0.2: v4(23.325,-18.475) 25.525,-18.475 29.025,-14.975 39.525,-14.975 40.5,-15.95 v4(43.975,-15.95)
  other v3: 21.8,-28.9
NOUTEN2: -41-K2.50 -61-K4.2 -61-R7.2 | length 38.9
  Top Layer w0.15: -61-K4.2@42.325,-15.45 42.9,-14.875 44.575,-14.875 44.725,-15.025 v3(44.725,-15.125)
  L2 Flex GND w0.15: v3@21.3,-28.7 v3(21.3,-28.625) 21.3,-27.525 22.45,-26.375 v4(22.45,-17.975) ; v4(43.925,-14.3) v3@44.738,-15.113
  L3 Flex Signals w0.2: v4(22.45,-17.975) 25.475,-17.975 28.925,-14.525 39.65,-14.525 40.5,-15.375 42.325,-15.375 43.4,-14.3 v4(43.925,-14.3)
NOUTEN3: -41-K2.49 -61-K3.6 -61-R6.2 | length 41.5
  Top Layer w0.15: -61-K3.6@41.125,-18.15 41.3,-18.325 v6(41.65,-18.325) 41.975,-18.325 42.275,-18.625 44.55,-18.625 44.75,-18.425 -61-R6.2@44.75,-18.05
  L2 Flex GND w0.15: 20.8,-28.7 20.8,-28.475 20.875,-28.4 20.875,-27.475 22.125,-26.225 22.125,-18.4 21.75,-18.025 v4(21.3,-18.025) ; v4(40.575,-14.675) 40.423,-14.827 40.423,-15.748 40.55,-15.875 40.55,-16.547 41.3,-17.297 41.3,-17.975 v6(41.65,-18.325)
  L3 Flex Signals w0.2: v4(21.3,-18.025) 21.675,-18.025 22.275,-17.425 25.35,-17.425 28.675,-14.1 40,-14.1 v4(40.575,-14.675)
  other v3: 20.8,-28.9
NOUTEN4: -41-K2.48 -61-K3.2 -61-R5.2 | length 33.4
  Top Layer w0.15: v6(40.1,-17.55) 40.2,-17.65 -61-K3.2@40.625,-17.65
  L2 Flex GND w0.15: v3@20.35,-28.25 20.425,-28.175 20.425,-27.45 21.8,-26.075 21.8,-18.8 21.65,-18.65 v4(21.3,-18.65) ; v5(39.35,-15.625) 39.9,-15.625 40.075,-15.8 v1(40.075,-16.15) 40.075,-17.1 40.1,-17.125 v6(40.1,-17.55)
  L3 Flex Signals w0.2: v4(21.3,-18.65) 22.4,-18.65 22.8,-19.05 25.575,-19.05 29,-15.625 v5(39.35,-15.625)
  other v3: 20.425,-28.25
NPD: -61-K1.3 -61-K3.1 -61-K3.5 -61-K4.1 -61-K4.5 | length 17.5
  Top Layer w0.15: -61-K3.5@41.125,-18.65 41.352,-18.877 v3(41.643,-18.877) ; -61-K4.1@42.825,-15.45 42.925,-15.35 v1(43.343,-15.35)
  Top Layer w0.2: -61-K1.3@38.65,-22.75 38.85,-22.75 38.975,-22.625 39.35,-22.625 39.825,-22.15 39.825,-20.775 v3(40.125,-20.475) 39.8,-20.15 39.8,-18.1 39.625,-17.925 39.625,-17.375 39.902,-17.098 40.323,-17.098 40.375,-17.15 -61-K3.1@40.625,-17.15 40.625,-16.603 v3(40.977,-16.251) 41.024,-16.251 -61-K4.5@41.325,-15.95
  L2 Flex GND w0.15: v3(40.977,-16.251) 41.08,-16.148 41.919,-16.148 42.623,-16.852 43.277,-16.852 43.575,-16.554 43.575,-16.189 43.343,-15.957 v1(43.343,-15.35)
  L2 Flex GND w0.2: v3(40.125,-20.475) 40.925,-20.475 41.727,-19.673 41.727,-18.961 v3(41.643,-18.877)
NRESET: -2-X6.1 -41-K2.20 -41-R1.2 | length 45.8
  Top Layer w0.2: -41-K2.20@26.8,-20.1 26.8,-18.6 27.05,-18.35 27.725,-18.35 28.1,-17.975 v3(28.1,-17.3)
  L2 Flex GND w0.2: v3(28.1,-17.3) v4(28.575,-17.3)
  L3 Flex Signals w0.2: v4(28.575,-17.3) 28.575,-16.7 29.125,-16.15 39.875,-16.15 40.375,-16.65 44.125,-16.65 44.8,-15.975 44.8,-14.075 45.274,-13.601 65,-13.601 -2-X6.1@66.27,-12.331
NSTIMEN: -23-K3.1 -41-K2.14 -61-K1.1 -61-R1.2 | length 50.6
  Top Layer w0.2: -61-K1.1@38.65,-23.75 38.65,-24.212 v8(38.656,-24.219)
  Top Layer w0.25: -61-R1.2@38.65,-25.1 38.65,-24.225 v8(38.656,-24.219)
  L2 Flex GND w0.2: v3(6.3,-7.025) 6.731,-7.456 6.731,-7.631 v5(7.225,-8.125) ; v4(27.475,-23.5) 27.475,-21.975 27.7,-21.75 v3@28.675,-21.75 ; v3(28.672,-21.747) v3@28.675,-21.75 ; v3@28.75,-21.75 v3@28.675,-21.75
  L2 Flex GND w0.25: v4(38.65,-23.4) 38.65,-24.212 v8(38.656,-24.219)
  L3 Flex Signals w0.2: v5(7.225,-8.125) 7.225,-11.1 7.725,-11.6 8.6,-12.476 8.6,-12.775 8.875,-13.05 8.875,-16.975 10.05,-18.15 10.05,-21.625 10.675,-22.25 21.575,-22.25 22.825,-23.5 v4(27.475,-23.5) 37.85,-23.5 37.95,-23.4 v4(38.65,-23.4)
NSTIMLE: -41-K2.15 -61-K1.5 -61-K5.1 -61-R3.2 | length 12
  Top Layer w0.2: v3(37.35,-21.5) 38.15,-21.5 -61-K1.5@38.15,-22.25
  L2 Flex GND w0.2: v3(28.976,-21.251) 29.127,-21.1 29.127,-20.227 v4(29.05,-20.15)
  L2 Flex GND w0.3: v5@37.302,-20.973 v5(37.35,-20.925) v3(37.35,-21.5)
  L3 Flex Signals w0.2: v4(29.05,-20.15) 36.625,-20.15 37.35,-20.875 v5(37.35,-20.925)
RXCAN: -2-X7.1 -11-K7.4 -41-K2.31 | length 54.8
  Top Layer w0.25: -41-K2.31@21.3,-20.1 v2(21.3,-19.3) ; v2(23.225,-9.975) -11-K7.4@23.7,-9.975
  L3 Flex Signals w0.25: v2(23.225,-9.975) 23.6,-9.975 25.6,-7.975 39.975,-7.975 41.791,-9.791 -2-X7.1@63.73,-9.791
  Bottom Layer w0.25: v2(21.3,-19.3) 21.3,-17.7 24.325,-14.675 24.325,-10.4 23.9,-9.975 v2(23.225,-9.975)
RXD0: -2-X16.1 -41-K2.2 | length 35.8
  L2 Flex GND w0.2: v3(28.675,-27.75) 28.675,-28.075 v5(28.925,-28.325)
  L3 Flex Signals w0.2: v5(28.925,-28.325) 43.836,-28.325 44.59,-27.571 -2-X16.1@63.73,-27.571
SCK: -2-X18.1 -23-K2.2 -41-K2.11 -61-K6.4 | length 74.5
  Top Layer w0.2: -23-K2.2@9.1,-14.7 9.1,-15.325 9.325,-15.55 v2(9.75,-15.55)
  L2 Flex GND w0.15: v5(45.225,-19.275) 45.631,-18.869 45.631,-14.856 45.025,-14.25 45.025,-13.7 45.225,-13.5 v3(45.225,-12.55)
  L2 Flex GND w0.2: v4(28,-22.975) 28.275,-23.25 v3(28.95,-23.25)
  L3 Flex Signals w0.2: v2(9.75,-15.55) 9.75,-16.354 10.475,-17.079 10.475,-21.375 10.775,-21.675 19.999,-21.675 20.199,-21.875 22.05,-21.875 23.15,-22.975 v4(28,-22.975) 28.425,-22.975 29,-22.4 40.525,-22.4 43.65,-19.275 v5(45.225,-19.275) 45.819,-18.681 65,-18.681 -2-X18.1@66.27,-17.411
SCL: -2-X10.1 -41-K2.25 -41-R3.2 -42-B1.1 -43-B2.9 | length 49.8
  Top Layer w0.2: -42-B1.1@38.775,-14.625 -43-B2.9@38.775,-15.925 39.1,-15.925 39.25,-16.075 39.25,-18.3 v1(39.075,-18.475) -41-R3.2@39.075,-19
  L2 Flex GND w0.2: v3(24.3,-20.375) v4(24.9,-20.375) ; v1(39.075,-18.475) v5(39.075,-17.95)
  L3 Flex Signals w0.2: v4(24.9,-20.375) 26.325,-20.375 28.475,-18.225 37.05,-18.225 37.5,-17.775 38.9,-17.775 v5(39.075,-17.95) 44.077,-17.95 45.886,-16.141 65,-16.141 -2-X10.1@66.27,-14.871
SDA: -2-X11.1 -41-K2.26 -41-R4.2 -42-B1.6 -43-B2.10 | length 48.1
  Top Layer w0.2: -41-R4.2@36.5,-19 36.5,-18.55 37.025,-18.025 37.025,-17.875 37.575,-17.325 v2(37.575,-16.675) -43-B2.10@37.575,-15.7 -42-B1.6@37.575,-14.575
  L2 Flex GND w0.2: v3(23.8,-20.1) v4(24.275,-19.625)
  L3 Flex Signals w0.2: v4(24.275,-19.625) 26.45,-19.625 28.25,-17.825 28.809,-17.825 29.083,-17.551 29.083,-16.916 29.324,-16.675 v2(37.575,-16.675) 39.725,-16.675 40.25,-17.2 44.192,-17.2 45.378,-16.014 45.378,-15.422 45.929,-14.871 -2-X11.1@63.73,-14.871
STCC: -41-R2.1 -61-K6.1 -61-Q5.1 | length 10.6
  Top Layer w0.25: -61-Q5.1@41.75,-13.775 43.025,-13.775 43.275,-13.525 v3(43.275,-12.55)
  L2 Flex GND w0.15: v3(43.275,-12.55) 43.275,-14.35 44.525,-15.6 44.9,-15.6 45.027,-15.727 45.027,-16.523 44.273,-17.277 44.273,-19.298 v7(44.275,-19.3)
STIMTE: -23-K3.2 -41-K2.16 -61-K1.6 -61-R4.1 | length 54
  Top Layer w0.2: -23-K3.2@5.75,-7.025 v3(5.75,-6.725) ; v3(37.802,-22.577) 37.975,-22.75 -61-K1.6@38.15,-22.75
  L2 Flex GND w0.2: v3(5.75,-6.725) 5.75,-7.35 7.25,-8.85 7.25,-11.2 7.876,-11.826 v5(8.65,-11.826) ; v4(28.075,-20.75) v3(28.675,-20.75) ; v1(37.075,-25.525) 37.45,-25.15 37.45,-24.514 37.25,-24.313 37.25,-23.129 v3(37.802,-22.577) 38.15,-22.229 v5(38.15,-21.3)
  L3 Flex Signals w0.2: v5(8.65,-11.826) 9.451,-11.826 9.6,-11.975 20.275,-11.975 20.725,-12.425 20.725,-15.85 20.198,-16.377 20.198,-20.798 20.525,-21.125 22.75,-21.125 23.15,-21.525 27.325,-21.525 28.075,-20.775 v4(28.075,-20.75) 28.075,-20.225 28.675,-19.625 28.8,-19.625 28.802,-19.627 29.198,-19.627 29.2,-19.625 36.75,-19.625 38.15,-21.025 v5(38.15,-21.3)
STMC: -61-K5.4 -61-Q1.2 -61-Q2.2 -61-Q3.2 -61-Q4.2 -61-Q5.3 | length 50.8
  Top Layer w0.2: -61-K5.4@36.35,-22.25 36.3,-22.3 36.3,-27 36.75,-27.45 -61-Q3.2@36.75,-28.385
  Top Layer w0.25: -61-Q3.2@36.75,-28.385 36.75,-29.125 37.025,-29.4 38.075,-29.4 38.435,-29.76 v2(38.86,-29.76) -61-Q4.2@41.6,-29.76 ; -61-Q5.3@39.72,-12.825 38.575,-12.825 v2(37.525,-11.775) 36.825,-11.075 36.825,-9.45 36.175,-8.8 36.175,-2.45 36.65,-1.975 -61-Q1.2@39.09,-1.975 39.9,-1.975 40.15,-2.225 40.15,-3.6 40.425,-3.875 -61-Q2.2@41.235,-3.875 -61-Q2.2@41.285,-3.875
  Bottom Layer w0.25: v2(37.525,-11.775) 37.877,-12.127 37.877,-13.033 37.525,-13.385 37.525,-15.915 38.077,-16.467 38.077,-16.889 37.612,-17.353 37.612,-21.237 38.86,-22.485 v2(38.86,-29.76)
SW1: -61-K4.3 -61-Q1.1 | length 16.7
  Top Layer w0.2: -61-Q1.1@39.09,-3.875 39.775,-3.875 39.975,-4.075 39.975,-6.6 39.55,-7.025 38.425,-7.025 37.7,-7.75 37.7,-10.475 38.5,-11.275 39.625,-11.275 40.55,-12.2 40.55,-14.5 41.025,-14.975 41.65,-14.975 41.825,-15.15 -61-K4.3@41.825,-15.45
SW2: -61-K4.7 -61-Q2.1 | length 22.7
  Top Layer w0.2: -61-Q2.1@41.285,-1.975 42.025,-1.975 42.25,-2.2 42.25,-4.3 41.95,-4.6 40.725,-4.6 40.375,-4.95 40.375,-6.875 39.825,-7.425 38.6,-7.425 38.1,-7.925 38.1,-10.275 38.7,-10.875 39.85,-10.875 40.925,-11.95 40.925,-14.275 41.125,-14.475 42,-14.475 v3(42.325,-14.8) ; -61-K4.7@42.325,-15.95 42.325,-16.075 42.675,-16.425 v6(43.1,-16.425)
  L2 Flex GND w0.2: v3(42.325,-14.8) 42.325,-15.65 v6(43.1,-16.425)
SW3: -61-K3.3 -61-Q3.1 | length 12
  Top Layer w0.2: -61-Q3.1@38.65,-28.385 39.465,-28.385 40.2,-27.65 40.2,-21.95 40.602,-21.548 40.602,-20.102 40.2,-19.7 40.2,-18.325 40.375,-18.15 -61-K3.3@40.625,-18.15
SW4: -61-K3.7 -61-Q4.1 | length 15.6
  Top Layer w0.2: v3(40.7,-22.575) 40.7,-27.925 41.625,-28.85 43.3,-28.85 43.5,-29.05 -61-Q4.1@43.5,-29.76 ; -61-K3.7@41.125,-17.65 v6(41.8,-17.65)
  L2 Flex GND w0.2: v3(40.7,-22.575) 40.7,-21.197 42.102,-19.795 42.102,-17.952 v6(41.8,-17.65)
TCK: -2-X12.1 -41-K2.57 | length 43.4
  L2 Flex GND w0.2: v3(24.8,-28.625) v4(24.8,-27.975)
  L3 Flex Signals w0.2: v4(24.8,-27.975) 25.075,-27.7 27.802,-27.7 27.927,-27.825 43.6,-27.825 45.124,-26.301 65,-26.301 -2-X12.1@66.27,-25.031